# EAGLE board walle (EAGLE 7.6.0)
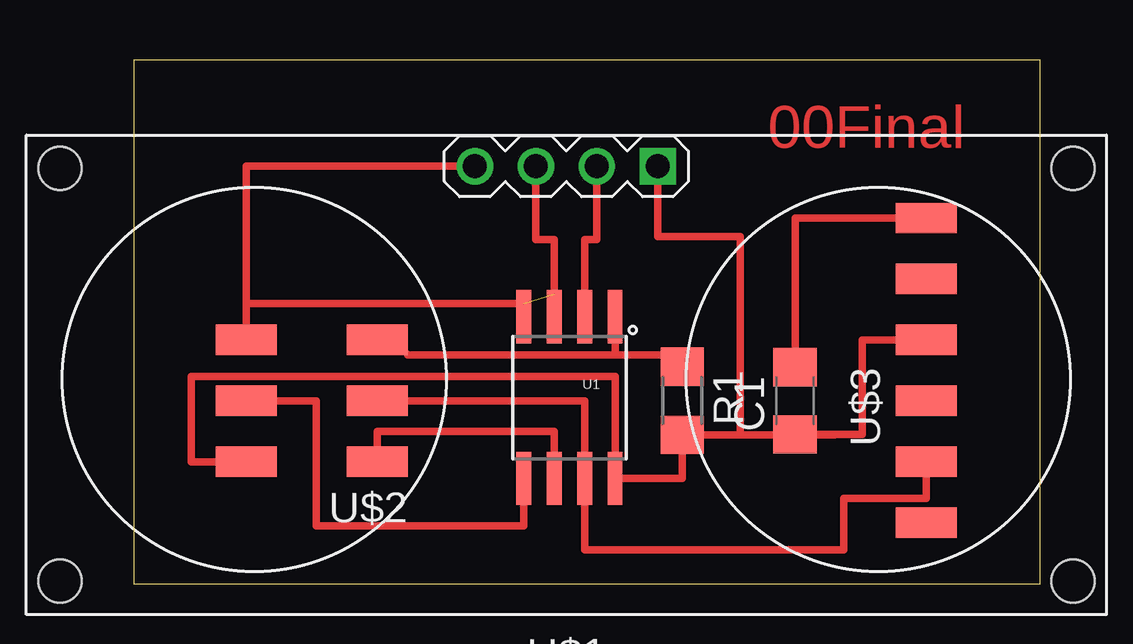
[diagram p0: board, top side]

Size 37.77 x 21.83 mm. Coordinates in mm from the lower left corner, seen from the top.
Outline: 0,0 37.77,0 37.77,21.83 0,21.83 0,0
Copper layers (1*16): Top 0.035mm / dielectric 1.5mm / Bottom 0.035mm
Design rules "default": minimum track width 10mil, minimum drill 24mil, track to track 8mil, track to pad 8mil, pad to pad 8mil, via to via 8mil, smd to smd 8mil, copper to edge 40mil, drill to drill 8mil, minimum pad ring 10mil, minimum via ring 8mil, stop-mask expansion 4mil, vias tented up to drill 0mil, thermal gap 10mil

## Footprints (pad centres in the part's own frame; a part is rotated, then mirrored left to right if it is on the bottom)
C1206 = smd 1.6 x 1.8: 1 -1.4,0; 2 1.4,0
R1206 = smd 1.6 x 1.803: 1 -1.422,0; 2 1.422,0
SO08-EIAJ = smd 0.61 x 2.21: 1 -1.905,-3.378; 2 -0.635,-3.378; 3 0.635,-3.378; 4 1.905,-3.378; 5 1.905,3.353; 6 0.635,3.353; 7 -0.635,3.353; 8 -1.905,3.353
ULTRASONIC-HC-SR04 = drill 1 square: 1 -3.81,-8.89 | drill 1: 2 -1.27,-8.89; 3 1.27,-8.89; 4 3.81,-8.89 | hole 1.8: -21.1,8.4; -21.1,-8.8; 21.1,-8.8; 21.1,8.4
2X03SMD = smd 2.54 x 1.27: 1 -2.54,2.54; 2 2.92,2.54; 3 -2.54,0; 4 2.92,0; 5 -2.54,-2.54; 6 2.92,-2.54
1X06SMD = smd 2.54 x 1.27: 1 0,6.35; 2 0,3.81; 3 0,1.27; 4 0,-1.27; 5 0,-3.81; 6 0,-6.35

## Placement (x,y rotation side)
C1  [C1206]  27.56,7.62 90 top
R1  [R1206]  22.86,7.62 270 top
U1  Tiny45-20-SMT  [SO08-EIAJ]  18.16,7.75 180 top
U$1  ULTRASONIC-HC-SR04  [ULTRASONIC-HC-SR04]  18.03,8.51 180 top
U$2  AVRISPSMD  [2X03SMD]  7.62,7.62 180 top
U$3  FTDI-SMD-HEADER  [1X06SMD]  33.02,8.89 0 top

## Library data of the parts
C1 R1 U$2 U$3 = fab
U1 = SparkFun-DigitalIC; PROD_ID: IC-08922
U$1 = diy-modules

## Nets
ECHO: U1.3 U$1.3
GND: U1.4 U$1.4 U$2.6
MISO: U1.6 U$2.1
MOSI: U1.5 U$2.4
N$1: C1.1 R1.2 U1.8 U$1.1 U$2.2 U$3.3
N$3: C1.2 U$3.1
PB5: R1.1 U1.1 U$2.5
SCK: U1.7 U$2.3 U$3.5
TRIG: U1.2 U$1.2

## Tracks (layer width: path | path; a pad name or v marks a point on that pad's centre or on a via)
ECHO
  Top 0.305: U$1.3 16.76,14.35 17.53,14.35 U1.3
GND  (1 unrouted)
  Top 0.305: U1.4 16.26,11.68 4.7,11.68 4.7,11.18 | 17.53,12.06 17.65,11.3 | 4.7,11.18 U$2.6 | U$1.4 4.7,17.4 4.7,11.18
  Top 0.406: 5.08,10.16 U$2.6
MISO
  Top 0.305: U$2.1 10.16,6.35 17.53,6.35 U1.6
MOSI
  Top 0.305: U$2.4 7.62,7.62 7.62,2.41 16.26,2.41 U1.5
N$1
  Top 0.305: U$2.2 2.41,5.08 2.41,8.64 20.07,8.64 U1.8 22.86,4.39 R1.2 25.27,6.2 | 25.27,6.2 29.21,6.2 C1.1 30.35,6.22 30.35,10.16 U$3.3 | U$1.1 21.84,14.48 25.27,14.48 25.27,6.2
N$3
  Top 0.305: U$3.1 27.56,15.24 C1.2
PB5
  Top 0.305: U$2.5 10.92,10.16 11.43,9.53 20.07,9.53 | 20.07,9.53 U1.1 | 20.07,9.53 22.86,9.53 R1.1
SCK
  Top 0.305: U$2.3 18.8,7.62 U1.7 18.8,1.4 29.59,1.4 29.59,3.56 33.02,3.56 U$3.5
TRIG
  Top 0.305: U$1.2 19.3,14.35 18.8,14.35 U1.2

## Text on the board
Top: 00Final